# EAGLE board 2DD-17-mk-1.5 (EAGLE 7.5.0)
VERSION: v1.5
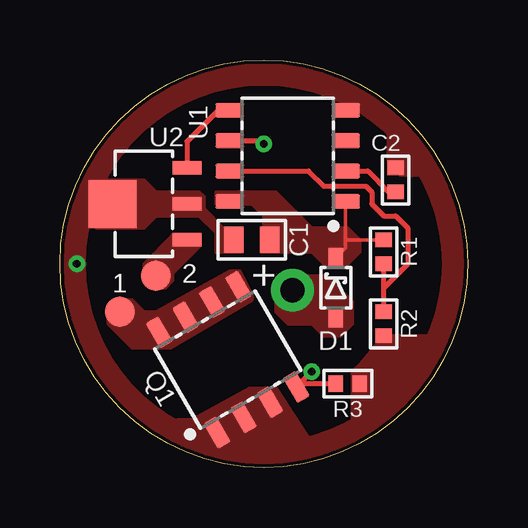
[diagram p0: board, top side]
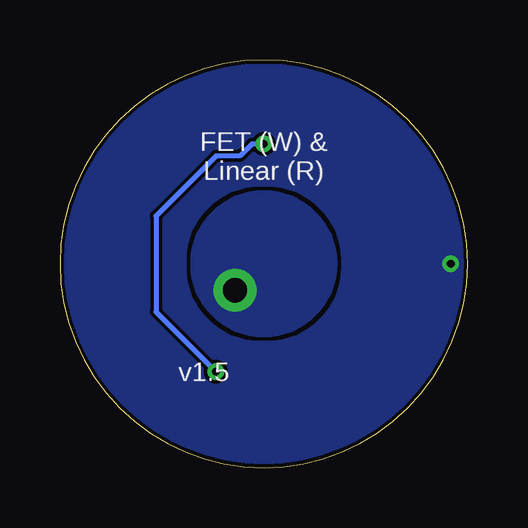
[diagram p1: board, bottom side, seen from below]

Size 17 x 17 mm. Coordinates in mm from the lower left corner, seen from the top.
Outline: 0,8.5 arc-180 17,8.5 arc-180 0,8.5
Copper layers (1*16): Top 0.0356mm / dielectric 1.5011mm / Bottom 0.0356mm
Design rules "LaenPCBOrder2 *": minimum track width 6mil, minimum drill 13mil, track to track 6mil, track to pad 6mil, pad to pad 6mil, via to via 6mil, smd to smd 6mil, copper to edge 6mil, drill to drill 6mil, minimum pad ring 7mil, minimum via ring 7mil, stop-mask expansion 3mil, vias tented up to drill 20mil, thermal gap 10mil

## Footprints (pad centres in the part's own frame; a part is rotated, then mirrored left to right if it is on the bottom)
1X01-SMD-1.25MM-DIA-NS = smd 1.25 x 1.25: P$1 0,0
1X01-1MM-CIR-NS = drill 1.016 pad 1.778: 1 0,0
1X01_NOSILK_NOSTOP = drill 0.33: P$1 0,0
C0603-TIGHTER = smd 0.8 x 1.1: 1 -0.75,0; 2 0.75,0
C0402 = smd 0.6 x 0.7: 1 -0.5,0; 2 0.5,0
SOD323-SCHOTTKY = smd 0.8 x 0.6: A -1.25,0; C 1.25,0
SO08-NARROWER = smd 0.6 x 1.2: 1 -1.905,-2.416; 2 -0.635,-2.416; 3 0.635,-2.416; 4 1.905,-2.416; 5 1.905,2.416; 6 0.635,2.416; 7 -0.635,2.416; 8 -1.905,2.416
R0402 = smd 0.6 x 0.7: 1 -0.5,0; 2 0.5,0
SOT89-NOTHERM = smd 0.58 x 1.2: 1 -1.5,-1.8; 3 1.5,-1.8; 4@1 0,-1.8 | smd 2 x 2: 4@2 0,1.3

## Placement (x,y rotation side)
1  M01SMD-1.25MM-DIA  [1X01-SMD-1.25MM-DIA-NS]  2.5,6.5 270 top
2  M01SMD-1.25MM-DIA  [1X01-SMD-1.25MM-DIA-NS]  4,8 0 top
+  M01PTH-1MM-CIR-NS  [1X01-1MM-CIR-NS]  9.7,7.4 180 top
-  M01NOT-A-VIA-NOPE  [1X01_NOSILK_NOSTOP]  0.7,8.5 90 bottom
C1  10u  [C0603-TIGHTER]  8,9.5 180 top
C2  1u  [C0402]  14,12 90 top
D1  BAT165  [SOD323-SCHOTTKY]  11.5,7.5 90 top
FRAME1  FRAME-LETTERNO_PACKAGE  [DUMMY]  0,0 0 top
Q1  IRLR6225  [SO08-NARROWER]  7,4.5 30 top
R1  19K  [R0402]  13.5,9 90 top
R2  4K7  [R0402]  13.5,6 90 top
R3  47K  [R0402]  12,3.5 0 top
U1  Tiny13  [SO08-NARROWER]  9.5,13 90 top
U2  AMC7135SOT-89-NOTHERM  [SOT89-NOTHERM]  3.5,11 90 top

## Library data of the parts
1 2 + - C1 C2 D1 Q1 R1-R3 U1 U2 = a_parts
FRAME1 = a_parts; DESIGNER: sean@yak.net; VERSION: v1.5

## Nets
GND: -.P$1 C1.2 C2.2 Q1.1 Q1.2 Q1.3 R2.1 R3.2 U1.4 U2.4@1 U2.4@2
N$1: R1.1 R2.2 U1.7
N$2: C2.1 U1.2
PWM_R: U1.5 U2.3
PWM_W: Q1.4 R3.1 U1.6
R: 2.P$1 U2.1
VBAT: +.1 D1.A
VCC: C1.1 D1.C R1.2 U1.1 U1.8
W: 1.P$1 Q1.5 Q1.6 Q1.7 Q1.8

## Tracks (layer width: path | path; a pad name or v marks a point on that pad's centre or on a via)
GND
  pour Top (isolate 0.152, rank 6, no thermals): 0,0 17,0 17,8.5 16,8.5 arc-90 8.5,1 arc-90 1,8.5 0,8.5
  pour Bottom (isolate 0.152, rank 6, no thermals): 0,0 0,17 17,17 17,0
  pour Top (isolate 0.152, rank 6, no thermals): 17,17 0,17 0,8.5 1,8.5 arc-90 8.5,16 arc-90 16,8.5 17,8.5
  pour Top (isolate 0.152, rank 5, no thermals): 13.7,14.4 13.7,12.8 14.2,12.2 15.5,12.2 15.5,12.4
  pour Top (isolate 0.152, rank 5, no thermals): 5.5,2 7.9,3.3 9,3.3 10.5,1 5.6,1 4.9,1.6 4.9,2
  pour Top (isolate 0.152, rank 5, no thermals): 12.2,1.7 12.2,4 12.5,4.3 13.5,5.5 15.5,5.5 15.5,5
  pour Top (isolate 0.152, rank 5, no thermals): 1.5,12 3.5,12 4,11.5 5.8,11.5 6,11.3 6,10.8 6.8,10 7.5,10 7.5,9 6.5,9 6.5,9.8 5.8,10.5 4,10.5 3.5,10 1.5,10
N$1
  Top 0.2: U1.7 10.37,12.37 11,11.73 12.77,11.73 13,11.5 13,11 13.5,10.5 14,10.5 14.5,10 14.5,8.5 13.5,7.5 | 13.5,7.5 R1.1 | R2.2 13.5,7.5
N$2
  Top 0.2: U1.2 12.84,12.37 13.7,11.5 C2.1
PWM_R
  Top 0.2: U1.5 6.61,14.9 5.3,13.6 U2.3
PWM_W  (via drill 0.33)
  Top 0.2: U1.6 8.37,13.63 v8.5,13.5 | v10.5,4 10.05,3.55 | 10.05,3.55 Q1.4 | R3.1 10.1,3.5 10.05,3.55
  Bottom 0.2: v8.5,13.5 9,13.5 9.5,13 10.5,13 13,10.5 13,6.5 v10.5,4
R
  pour Top (isolate 0.152, rank 5, no thermals): 3.5,8 3.5,8.5 4.7,9.7 5.8,9.7 5.8,9.2 4.7,8.1 4.7,7.8 4.4,7.5 4,7.5
VBAT
  pour Bottom (isolate 0.152, no thermals): 5.5,8.5 arc-180 11.5,8.5 arc-180
  pour Top (isolate 0.152, rank 5, no thermals): 9,7.5 9.5,8 11.1,8 12.2,6.9 12.2,6 11.7,5.5 11,5.5 10.5,6 9.5,6 9,6.5
VCC
  Top 0.152: U1.1 11.92,9.6 | 11.92,9.6 11.92,9.17 D1.C | R1.2 12.02,9.5 11.92,9.6
  pour Top (isolate 0.152, rank 5, no thermals): 6.5,11.5 6.5,11 8,11 8.5,10.5 8.5,9 10.5,9 11,8.5 12,8.5 12.5,9 12.5,9.5 12,10 11,10 10.5,10 9,11.5
W
  pour Top (isolate 0.152, rank 5, no thermals): 2,6.5 2.5,7 3,7 3.5,6.5 4,6.5 7.1,8.2 7.5,8.2 8,7.2 8,7 4.6,5 3,5 2,6

## Text on the board
bPlace: FET (W) & / Linear (R)